# EAGLE board LP_IMS_IF_Electrode_CL_v7 (EAGLE 9.6.2)
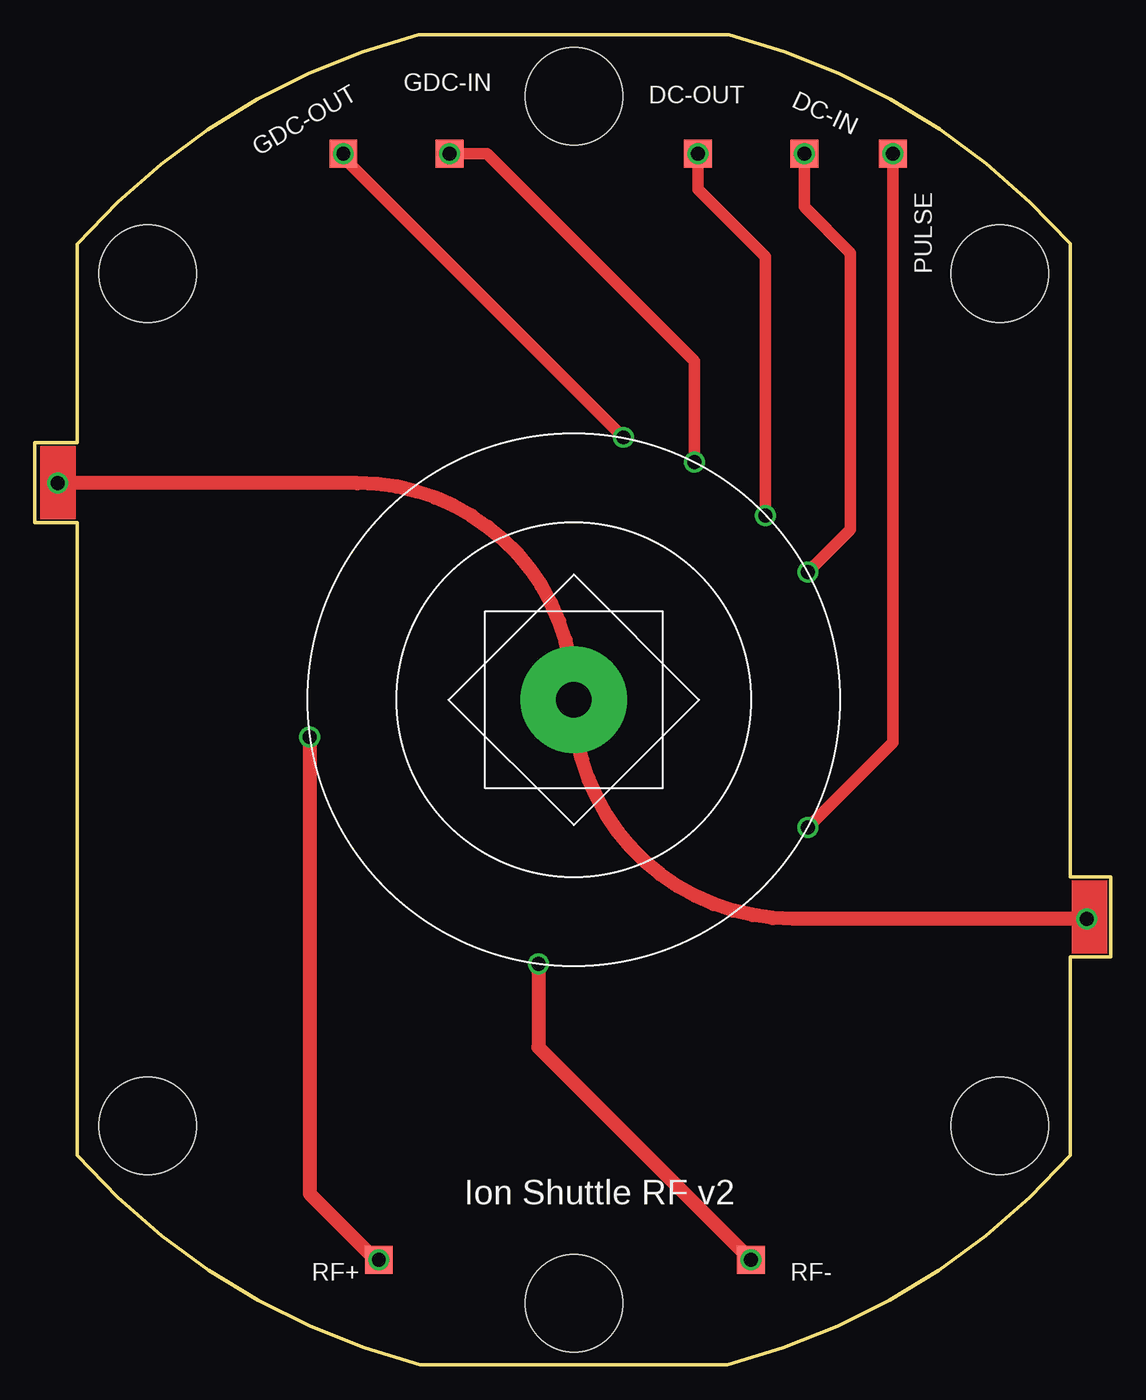
[diagram p0: board, top side]

Size 77.09 x 95.25 mm. Coordinates in mm from the lower left corner, seen from the top.
Outline: 3.05,14.99 3.05,60.33 0,60.33 0,66.04 3.05,66.04 3.05,80.26 arc-34 27.48,95.25 49.73,95.25 arc-34 74.17,80.29 74.17,34.92 77.09,34.92 77.09,29.21 74.17,29.21 74.17,14.99 arc-34 49.61,0 27.61,0 arc-34 3.05,14.99
Copper layers (1*16): Top 0.035mm / dielectric 1.5mm / Bottom 0.035mm
Design rules "default *": minimum track width 6mil, minimum drill 0.35mm, track to track 6mil, track to pad 6mil, pad to pad 6mil, via to via 6mil, smd to smd 6mil, copper to edge 40mil, drill to drill 6mil, minimum pad ring 10mil, minimum via ring 8mil, stop-mask expansion 4mil, vias tented up to drill 0mil, thermal gap 10mil
Holes 6.99 mm at 8.08,78.16 8.08,17.09 69.14,17.09 69.14,78.16 38.61,4.39 38.61,90.86

## Footprints (pad centres in the part's own frame; a part is rotated, then mirrored left to right if it is on the bottom)
TP20SQ = smd 2 x 2: TP 0,0

## Placement (x,y rotation side)
DC-IN  [TP20SQ]  55.12,86.74 0 top
DC-OUT  [TP20SQ]  47.5,86.74 0 top
GDC-IN  [TP20SQ]  22.1,86.74 0 top
GDC-OUT  [TP20SQ]  29.72,86.74 0 top
PULSE  [TP20SQ]  61.47,86.74 0 top
RF+  [TP20SQ]  24.64,7.49 0 top
RF-  [TP20SQ]  51.31,7.49 0 top

## Library data of the parts
DC-IN DC-OUT GDC-IN GDC-OUT PULSE RF+ RF- = testpad

## Tracks (layer width: path | path; a pad name or v marks a point on that pad's centre or on a via)
PULSE  (via drill 1, 1 pad 1.3)
  Top 0.813: v55.37,38.48 61.47,44.58 v61.47,86.74
S$1  (via drill 1, 2.54 pad 7.62)
  Top 1.016: v75.36,31.93 54.3,31.93 arc-90 v38.61,47.62 arc90 23.09,63.14 v1.65,63.14
S$2  (via drill 1)
  Top 1.016: v19.68,44.96 19.68,12.24 24.34,7.59
S$4  (via drill 1)
  Top 1.016: 51.31,7.49 36.07,22.73 v36.07,28.7
S$8  (via drill 1)
  Top 0.813: v42.16,66.42 21.56,87.03 v22.09,86.74 v22.1,86.74
S$9  (via drill 1)
  Top 0.813: v29.72,86.74 32.38,86.74 47.24,71.88 v47.24,64.64
S$10  (via drill 1)
  Top 0.813: v47.5,86.74 47.5,84.2 52.32,79.38 v52.32,60.83
S$11  (via drill 1, 1 pad 1.3)
  Top 0.813: v55.12,86.74 55.12,82.93 58.42,79.63 58.42,59.82 v55.37,56.77
S$16  (via drill 1)
  other vias: 24.64,7.49
S$17  (via drill 1)
  other vias: 51.31,7.49
(copper drawn outside any net)
  shapes: Top area x2

## Text on the board
tNames: Ion Shuttle RF v2